# Altium PCB SFCslaver.PcbDoc (part 3 of 6)
Units mm, origin at the board's own origin, x right, y up, seen from the top; angles counter-clockwise.
Board outline 149.66 x 75.74 mm, 2 copper layers (Top Layer, Bottom Layer); 284 components, 212 nets, 830 pads, 310 vias.
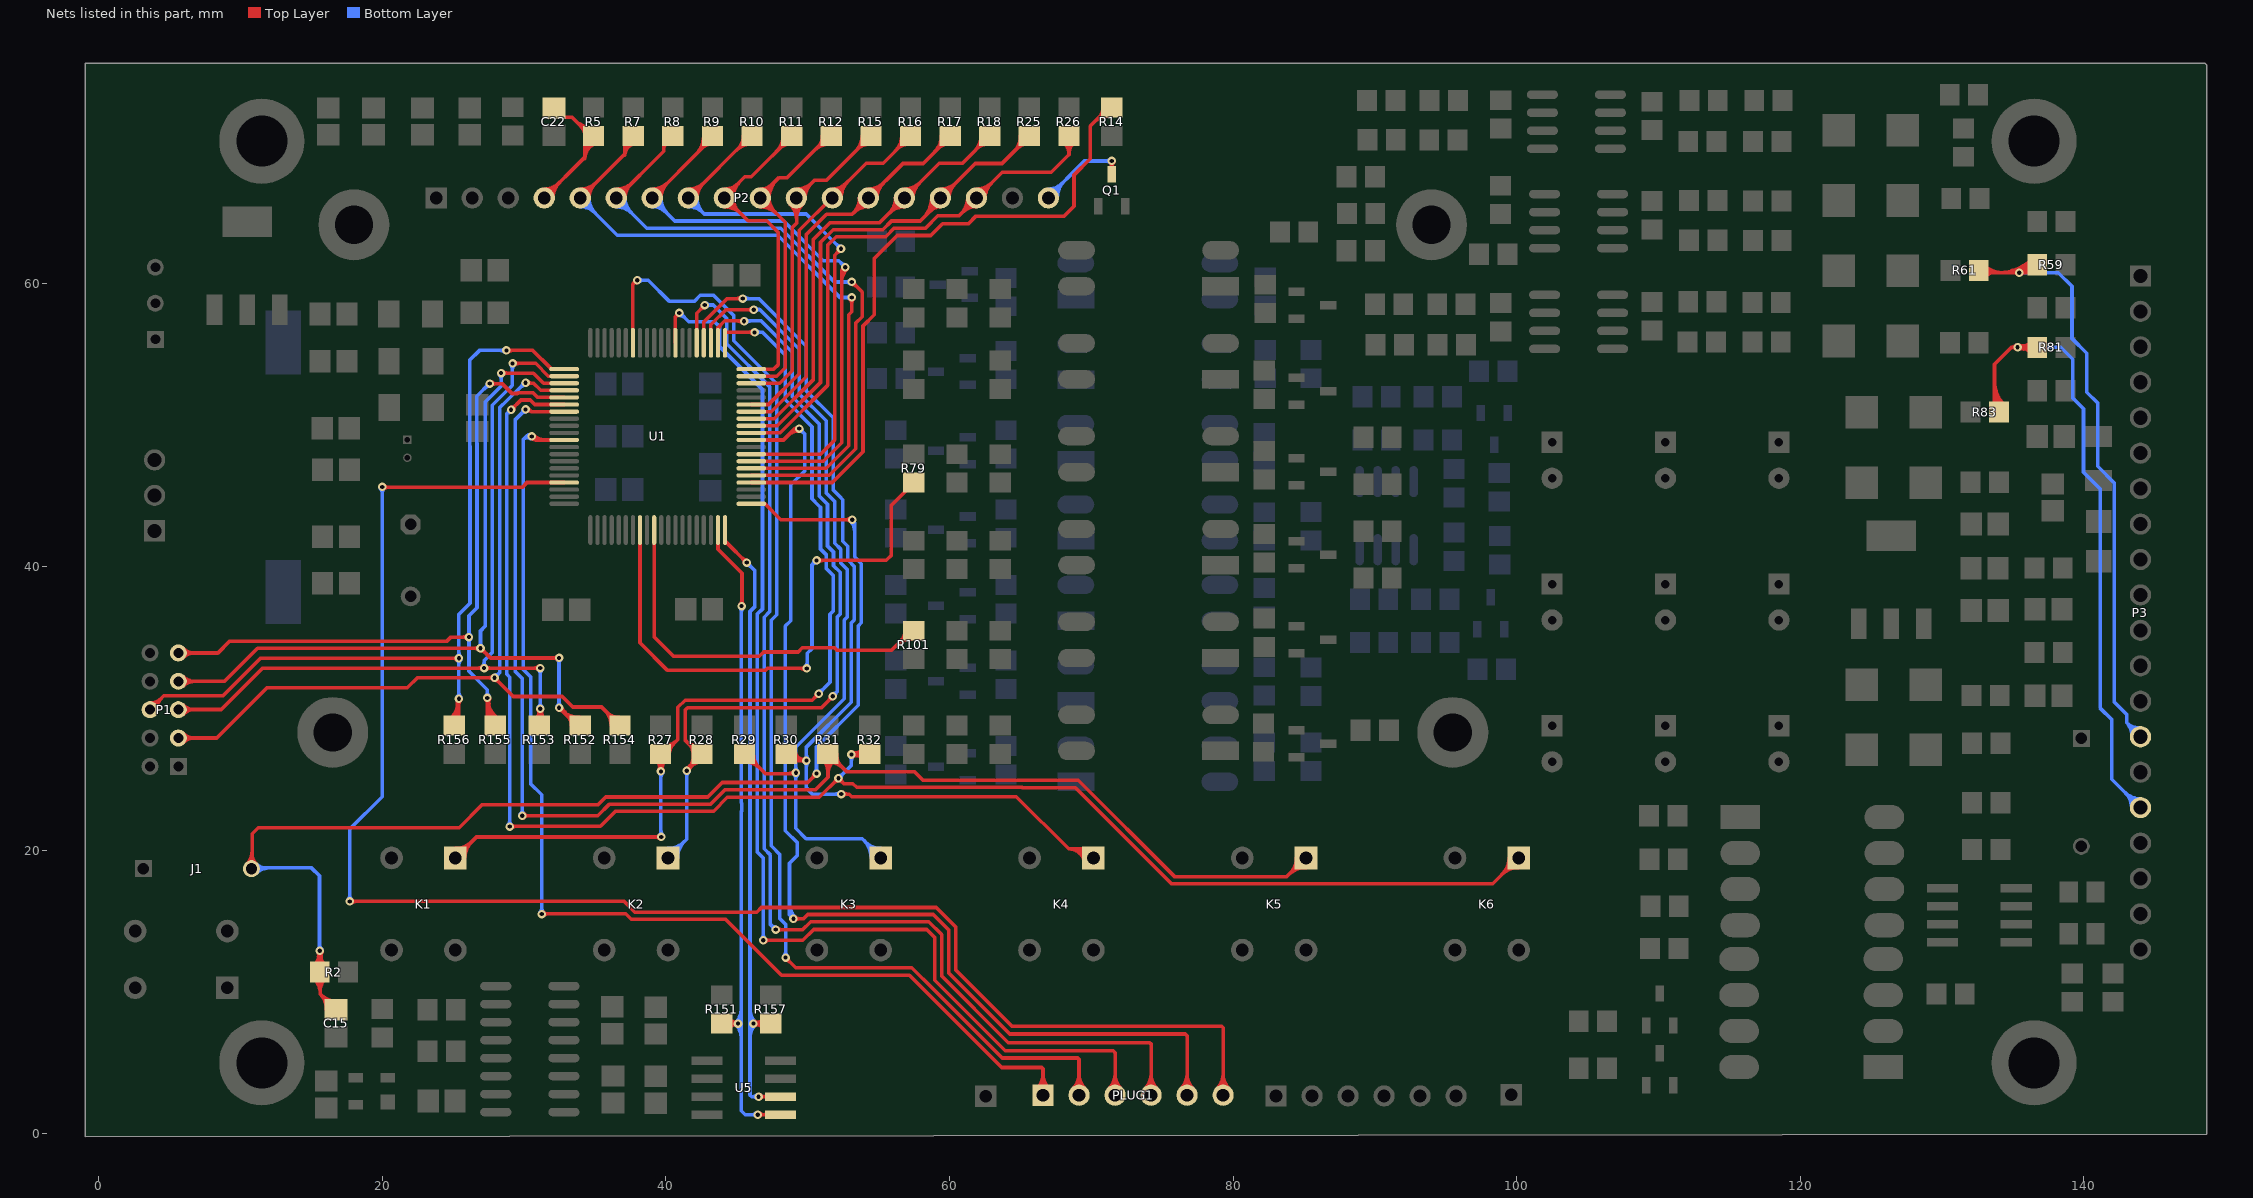
[diagram p3: the nets of this part, all layers, seen from the top]

## Via types
v1: diameter 0.6, hole 0.3, Top Layer to Bottom Layer, 310 vias

## Nets (pads, with @x,y where several pads share a name; then routed paths per layer and width w, separated by ;. In a path a pad name is that pad's centre, name@x,y a point inside that pad or via, vN(x,y) a via of type N, cw(c..) or ccw(c..) an arc to the next point about the centre after c; other vN are vias at no path point) (continued)
I2C_SCL: R157.2 U1.40 U5.6 | length 55.1
  Top Layer w0.254: U1.40@44.173,41.656 cw(c44.173,41.292) 44.43,41.549 ; U1.40@44.173,42.579 44.173,41.806 v1@45.809,40.17 ; v1@45.522,40.284 ccw(c45.104,40.284) 45.399,40.58 ccw(c45.695,40.875) v1@45.695,40.457 ; v1@46.264,7.623 cw(c46.473,7.261) 46.581,7.664 cw(c46.689,8.068) v1@46.327,7.859 ; v1@46.264,7.922 ccw(c46.473,8.284) 46.581,7.88 ccw(c46.689,7.477) v1@46.327,7.686 ; v1@46.3,7.65 cw(c46.595,7.355) 46.595,7.772 cw(c46.595,8.19) v1@46.3,7.895 ; v1(46.533,2.616) 47.93,2.616 U5.6@47.955,2.591 ; v1@46.655,2.494 cw(c46.95,2.199) 46.95,2.616 cw(c46.95,3.034) v1@46.655,2.739 ; R157.2@46.889,7.418 ccw(c46.177,6.881) v1(46.177,7.772) ; R157.2@46.898,8.12 cw(c46.177,8.694) v1(46.177,7.772) ; U5.6@47.169,2.494 ccw(c46.874,2.199) 46.874,2.616 ccw(c46.874,3.034) U5.6@47.169,2.739 ; R157.2@47.6,7.772 v1(46.177,7.772)
  Bottom Layer w0.254: v1@45.695,40.111 cw(c45.695,39.694) 45.99,39.989 cw(c46.285,40.284) v1@45.868,40.284 ; v1@45.72,40.259 46.279,39.7 46.279,37.183 45.931,36.836 v1@45.931,7.755 ; 45.931,6.761 cw(c47.189,6.761) v1@46.3,7.65 ; 45.931,7.374 cw(c46.576,7.374) v1@46.12,7.83 ; 45.931,8.171 ccw(c46.576,8.171) v1@46.12,7.715 ; 45.931,8.784 ccw(c47.189,8.784) v1@46.3,7.895 ; v1@45.999,7.798 v1@46.152,7.798 ; v1(46.177,7.772) 45.949,7.772 v1@45.931,7.755 ; v1@46.41,2.494 ccw(c46.115,2.199) 46.115,2.616 ccw(c46.115,3.034) v1@46.41,2.739 ; v1(46.533,2.616) 46.05,2.616 45.931,2.735 v1@45.931,7.755
  other v1: 45.695,40.284
I2C_SDA: R151.1 U1.39 U5.5 | length 56.3
  Top Layer w0.254: U1.39@43.673,42.579 43.673,41.229 45.364,39.537 45.364,37.16 45.339,37.135 v1(45.339,37.211) ; R151.1@43.942,7.849 43.993,7.798 v1@45.212,7.798 ; R151.1@44.247,7.571 cw(c44.702,7.227) 44.702,7.798 ; R151.1@44.415,8.149 ccw(c45.212,8.877) v1@45.212,7.798 ; R151.1@44.449,7.418 cw(c45.212,6.843) v1@45.212,7.798 ; R151.1@44.577,7.968 cw(c44.427,7.409) v1@44.934,7.689 ; R151.1@44.606,7.798 cw(c44.606,7.293) v1@44.963,7.65 ; 44.729,7.798 ccw(c44.729,8.129) v1@44.963,7.895 ; v1@44.927,7.843 cw(c44.639,7.97) 44.72,7.666 cw(c44.81,7.331) v1@44.994,7.626 ; v1(45.085,7.772) 45.187,7.772 v1@45.212,7.798 ; v1@45.217,37.333 ccw(c44.86,37.69) 45.364,37.69 ; 45.364,37.567 ccw(c45.695,37.567) v1@45.461,37.333 ; v1(46.482,1.346) U5.5@47.879,1.346 ; v1@46.604,1.224 cw(c46.9,0.929) 46.9,1.346 cw(c46.9,1.764) v1@46.604,1.469 ; U5.5@47.169,1.224 ccw(c46.874,0.929) 46.874,1.346 ccw(c46.874,1.764) U5.5@47.169,1.469
  Bottom Layer w0.254: v1@44.963,7.65 cw(c44.115,6.803) 45.314,6.803 ; v1@44.963,7.895 ccw(c44.115,8.742) 45.314,8.742 ; v1(45.085,7.772) 45.11,7.798 v1@45.288,7.798 ; v1@45.142,7.715 ccw(c44.729,8.129) 45.314,8.129 ; v1@45.142,7.83 cw(c44.729,7.416) 45.314,7.416 ; v1@45.217,37.089 cw(c44.983,36.855) 45.314,36.855 ; 45.314,36.732 cw(c45.818,36.732) v1@45.461,37.089 ; v1(45.339,37.211) 45.314,37.186 45.314,23.353 45.351,23.316 45.351,22.759 45.314,22.722 45.314,1.626 45.593,1.346 v1(46.482,1.346) ; v1@46.36,1.224 ccw(c46.064,0.929) 46.064,1.346 ccw(c46.064,1.764) v1@46.36,1.469
ISP_SELECT: C15.1 J1.2 R2.2 U1.41 | length 106.7
  Top Layer w0.254: J1.2@10.435,19.029 ccw(c9.505,19.959) 10.82,19.959 ; J1.2@10.615,18.849 ccw(c10.118,19.346) 10.82,19.346 ; J1.2@10.82,18.72 10.82,21.158 11.252,21.59 25.425,21.59 27.051,23.216 35.23,23.216 35.763,23.749 42.951,23.749 43.975,24.772 49.995,24.772 v1@50.635,25.413 ; 10.82,19.714 ccw(c11.789,19.714) J1.2@11.104,19.029 ; R2.2@15.181,10.949 cw(c14.119,9.887) 15.621,9.887 ; R2.2@15.181,11.86 ccw(c14.18,12.861) v1@15.596,12.861 ; R2.2@15.361,11.129 cw(c14.732,10.5) 15.621,10.5 ; R2.2@15.361,11.68 ccw(c14.793,12.247) 15.596,12.247 ; v1@15.446,12.817 cw(c15.052,12.589) 15.491,12.471 ; v1@15.473,12.781 cw(c15.178,12.486) 15.596,12.486 cw(c16.013,12.486) v1@15.718,12.781 ; 15.505,12.523 cw(c15.872,12.424) v1@15.682,12.753 ; v1@15.509,12.753 cw(c15.339,12.459) 15.667,12.547 ; 15.596,12.202 ccw(c16.334,12.202) R2.2@15.812,11.68 ; v1@15.596,12.815 ccw(c16.947,12.815) R2.2@15.991,11.86 ; v1(15.596,12.903) 15.596,11.303 15.545,11.354 15.697,11.354 15.621,11.43 15.621,9.855 ; 15.621,10.055 cw(c16.886,10.055) R2.2@15.991,10.949 ; 15.693,9.783 ccw(c16.689,10.779) C15.1@16.689,9.371 ; 15.696,12.441 cw(c16.174,12.569) v1@15.745,12.817 ; C15.1@16.045,9.431 cw(c15.383,8.768) C15.1@16.32,8.754 ; C15.1@16.066,8.758 ccw(c14.547,8.781) 15.621,9.855 ; C15.1@16.127,9.35 ccw(c16.689,9.912) C15.1@16.689,9.117 ; C15.1@16.764,8.712 15.621,9.855 ; U1.41@46.023,44.429 46.986,44.429 48.108,43.307 v1@53.086,43.307 ; U1.41@46.923,44.406 cw(c46.923,44.197) 47.07,44.345 ; v1@50.449,25.4 cw(c50.032,25.4) 50.327,25.105 cw(c50.622,24.809) v1@50.622,25.227 ; v1@53.014,43.185 ccw(c52.719,42.889) 52.719,43.307 ccw(c52.719,43.725) v1@53.014,43.429
  Bottom Layer w0.254: J1.2@10.795,18.745 15.011,18.745 15.57,18.186 v1@15.57,12.903 ; J1.2@10.924,18.54 cw(c11.421,18.043) 11.421,18.745 ; J1.2@11.104,18.36 cw(c12.034,17.43) 12.034,18.745 ; J1.2@11.104,19.029 ccw(c11.789,19.714) 11.789,18.745 ; v1@15.473,13.026 ccw(c15.239,13.26) 15.57,13.26 ; 15.57,13.382 ccw(c16.075,13.382) v1@15.718,13.026 ; v1@50.5,25.522 ccw(c50.205,25.818) 50.622,25.818 ccw(c51.04,25.818) v1@50.745,25.522 ; v1(50.622,25.4) 50.622,27.28 53.569,30.226 53.569,35.813 53.787,36.031 53.787,40.21 53.316,40.68 53.316,43.077 v1@53.086,43.307 ; v1@53.014,43.185 cw(c52.286,42.456) 53.316,42.456
  other v1: 53.137,43.307
JL3: PLUG1.6 U1.17 | length 121.7
  Top Layer w0.254: v1(17.704,16.383) 37.059,16.383 37.812,15.63 46.409,15.63 46.738,15.959 59.07,15.959 60.455,14.573 60.455,11.536 64.413,7.578 79.188,7.578 79.299,7.468 PLUG1.6@79.299,2.718 ; v1@17.826,16.261 cw(c18.121,15.965) 18.121,16.383 cw(c18.121,16.801) v1@17.826,16.505 ; v1@19.99,45.644 20.052,45.581 29.859,45.581 30.206,45.929 U1.17@32.823,45.929 ; v1@20.112,45.496 cw(c20.318,45.29) 20.318,45.581 ; v1@20.112,45.741 ccw(c20.497,46.125) 20.497,45.581 ; PLUG1.6@78.858,3.158 ccw(c77.795,4.222) 79.299,4.222 ccw(c80.803,4.222) PLUG1.6@79.739,3.158 ; PLUG1.6@79.038,2.979 ccw(c78.408,3.609) 79.299,3.609 ccw(c80.19,3.609) PLUG1.6@79.56,2.979
  Bottom Layer w0.254: v1@17.581,16.505 ccw(c17.286,16.801) 17.704,16.801 ccw(c18.121,16.801) v1@17.826,16.505 ; v1(17.704,16.383) 17.704,21.488 19.99,23.774 v1@19.99,45.644 ; v1@19.867,45.496 cw(c19.572,45.201) 19.99,45.201 cw(c20.407,45.201) v1@20.112,45.496
  other v1: 19.99,45.618
JL6: PLUG1.5 U1.50 | length 85.3
  Top Layer w0.254: U1.50@46.023,48.929 48.294,48.929 49.098,49.733 ; 48.587,49.222 cw(c49.403,48.407) v1@49.403,49.56 ; 49.021,49.656 cw(c49.403,49.274) v1@49.403,49.814 ; v1@49.073,15.164 49.708,15.164 50.004,15.46 58.863,15.46 59.956,14.366 59.956,11.329 64.25,7.036 76.632,7.036 76.759,6.909 PLUG1.5@76.759,2.718 ; v1@49.119,15.041 cw(c49.414,14.746) 49.414,15.164 cw(c49.414,15.581) v1@49.119,15.286 ; v1@49.254,49.645 ccw(c49.098,49.551) 49.098,49.733 ; v1@49.254,49.822 cw(c49.098,49.915) 49.098,49.733 ; v1(49.403,49.733) 49.098,49.733 ; PLUG1.5@76.318,3.158 ccw(c75.255,4.222) 76.759,4.222 ccw(c78.263,4.222) PLUG1.5@77.199,3.158 ; PLUG1.5@76.498,2.979 ccw(c75.868,3.609) 76.759,3.609 ccw(c77.65,3.609) PLUG1.5@77.02,2.979
  Bottom Layer w0.254: 48.717,15.643 ccw(c49.476,15.643) v1@48.939,15.107 ; 48.717,16.256 ccw(c50.089,16.256) v1@49.119,15.286 ; v1@48.857,15.329 48.831,15.329 48.717,15.443 48.717,19.075 49.276,19.634 49.276,20.523 48.426,21.373 48.426,35.802 48.81,36.186 48.81,45.762 49.805,46.757 49.805,49.331 49.416,49.721 v1@49.416,49.746 ; v1@49.403,49.56 cw(c49.403,49.143) 49.698,49.438 cw(c49.994,49.733) v1@49.576,49.733
  other v1: 48.997,15.164
JL7: PLUG1.4 U1.65 | length 91.8
  Top Layer w0.254: U1.65@42.173,55.779 42.173,57.87 v1@42.723,58.42 ; v1@42.575,58.445 cw(c42.158,58.445) 42.453,58.15 cw(c42.748,57.855) v1@42.748,58.272 ; v1(47.752,14.402) 47.777,14.427 47.777,14.529 47.93,14.376 49.632,14.376 50.216,14.961 58.541,14.961 59.457,14.045 59.457,11.123 64.154,6.426 74.117,6.426 74.219,6.325 PLUG1.4@74.219,2.718 ; v1@47.874,14.279 cw(c48.108,14.045) 48.108,14.376 ; v1@47.874,14.524 ccw(c48.231,14.881) 48.231,14.376 ; PLUG1.4@73.778,3.158 ccw(c72.715,4.222) 74.219,4.222 ccw(c75.723,4.222) PLUG1.4@74.659,3.158 ; PLUG1.4@73.958,2.979 ccw(c73.328,3.609) 74.219,3.609 ccw(c75.11,3.609) PLUG1.4@74.48,2.979
  Bottom Layer w0.254: v1@42.723,58.445 43.338,58.445 44.281,57.502 44.281,55.724 47.311,52.694 47.311,36.804 46.929,36.422 46.929,20.096 47.371,19.654 47.371,14.757 47.591,14.538 v1@47.743,14.538 ; v1@42.871,58.323 cw(c43.166,58.028) 43.166,58.445 cw(c43.166,58.863) v1@42.871,58.568 ; 47.413,14.715 ccw(c47.752,15.054) v1@47.752,14.575 ; 47.475,14.654 cw(c47.223,14.402) v1@47.579,14.402
  other v1: 42.748,58.445
JL8: PLUG1.3 U1.68 | length 90
  Top Layer w0.254: U1.68@40.673,55.779 40.673,57.614 ; v1@40.772,57.876 cw(c40.431,57.856) 40.673,57.614 ; v1@40.894,57.887 40.894,57.836 40.673,57.614 ; v1@40.935,57.714 ccw(c40.914,57.373) 40.673,57.614 ; v1(46.863,13.64) 49.657,13.64 50.419,14.402 58.395,14.402 58.958,13.838 58.958,10.815 63.931,5.842 71.552,5.842 71.679,5.715 PLUG1.3@71.679,2.718 ; v1@46.985,13.517 cw(c47.281,13.222) 47.281,13.64 cw(c47.281,14.057) v1@46.985,13.762 ; PLUG1.3@71.238,3.158 ccw(c70.175,4.222) 71.679,4.222 ccw(c73.183,4.222) PLUG1.3@72.119,3.158 ; PLUG1.3@71.418,2.979 ccw(c70.788,3.609) 71.679,3.609 ccw(c72.57,3.609) PLUG1.3@71.94,2.979
  Bottom Layer w0.254: v1@40.945,57.714 cw(c40.945,57.173) 41.327,57.555 ; v1@40.996,57.887 41.605,57.277 43.434,57.277 43.782,56.929 43.782,55.517 46.812,52.487 46.812,37.011 46.43,36.629 46.43,19.889 46.872,19.447 v1@46.872,13.665 ; v1@41.118,57.887 ccw(c41.413,57.887) 41.204,57.678 ; v1@46.741,13.762 ccw(c46.424,14.079) 46.872,14.079 ; 46.872,14.036 ccw(c47.259,14.036) v1@46.985,13.762
  other v1: 40.945,57.887
JL9: PLUG1.2 U1.74 | length 92.4
  Top Layer w0.254: U1.74@37.673,55.779 37.673,59.923 ; 37.696,59.946 ccw(c37.444,60.198) v1@37.8,60.198 ; v1@37.957,60.026 ccw(c37.924,59.671) 37.673,59.923 ; v1(37.973,60.198) 37.973,60.223 37.673,59.923 ; v1@48.438,12.248 cw(c48.438,11.83) 48.733,12.125 cw(c49.028,12.421) v1@48.611,12.421 ; v1(48.438,12.421) 49.149,11.709 57.348,11.709 58.156,10.901 58.166,10.901 63.724,5.343 69.028,5.343 69.139,5.232 PLUG1.2@69.139,2.718 ; PLUG1.2@68.698,3.158 ccw(c67.635,4.222) 69.139,4.222 ccw(c70.643,4.222) PLUG1.2@69.579,3.158 ; PLUG1.2@68.878,2.979 ccw(c68.248,3.609) 69.139,3.609 ccw(c70.03,3.609) PLUG1.2@69.4,2.979
  Bottom Layer w0.254: v1(37.973,60.198) 38.76,60.198 40.259,58.699 42.001,58.699 42.433,59.131 43.358,59.131 44.78,57.709 44.78,55.931 47.81,52.901 47.81,36.598 47.428,36.216 47.428,20.303 48.031,19.699 48.031,15.179 48.449,14.761 48.449,12.432 v1(48.438,12.421) ; v1@38.095,60.076 cw(c38.391,59.78) 38.391,60.198 cw(c38.391,60.616) v1@38.095,60.32 ; v1@48.315,12.543 ccw(c47.992,12.866) 48.449,12.866 ; 48.449,12.81 ccw(c48.827,12.81) v1@48.56,12.543
JL10: PLUG1.1 U1.11 | length 87.4
  Top Layer w0.254: v1@30.474,49.117 ccw(c30.929,49.572) 30.929,48.929 ; v1@30.556,49.2 30.827,48.929 ; v1@30.567,49.005 cw(c30.627,48.728) 30.827,48.929 ; v1@30.653,49.297 ccw(c31.542,50.185) 31.542,48.929 ; v1@30.704,49.174 ccw(c30.999,49.174) 30.79,48.966 ; v1(31.242,15.494) 31.267,15.519 37.16,15.519 37.549,15.131 44.203,15.131 48.158,11.176 57.175,11.176 63.678,4.674 66.497,4.674 66.599,4.572 PLUG1.1@66.599,2.718 ; v1@31.364,15.372 cw(c31.721,15.015) 31.721,15.519 ; v1@31.364,15.616 ccw(c31.598,15.85) 31.598,15.519 ; U1.11@32.823,48.929 30.827,48.929 ; PLUG1.1@66.158,3.158 ccw(c65.095,4.222) 66.599,4.222 ccw(c68.103,4.222) PLUG1.1@67.039,3.158 ; PLUG1.1@66.338,2.979 ccw(c65.708,3.609) 66.599,3.609 ccw(c67.49,3.609) PLUG1.1@66.86,2.979
  Bottom Layer w0.254: 30.173,49.197 cw(c30.402,48.968) v1@30.574,49.243 ; v1@30.401,49.061 ccw(c30.15,48.841) 30.15,49.174 ; v1@30.401,49.288 cw(c30.15,49.507) 30.15,49.174 ; v1@30.439,49.028 ccw(c30.228,48.689) 29.947,48.971 ; v1(30.531,49.174) 30.15,49.174 ; v1@31.12,15.616 ccw(c30.824,15.912) 31.242,15.912 ccw(c31.66,15.912) v1@31.364,15.616 ; v1(31.242,15.494) 31.242,23.901 30.455,24.689 30.455,32.233 29.947,32.741 29.947,48.971 ; 29.947,48.971 30.15,49.174
JTAG_TCK: P1.9 R155.1 U1.5 | length 64.7
  Top Layer w0.254: P1.9@5.613,33.908 8.406,33.908 9.246,34.747 24.562,34.747 24.841,35.027 v1(26.111,35.027) ; P1.9@5.948,33.574 cw(c6.755,32.766) 6.755,33.908 cw(c6.755,35.05) P1.9@5.948,34.242 ; v1@25.989,34.904 ccw(c25.694,34.609) 25.694,35.027 ccw(c25.694,35.444) v1@25.989,35.149 ; v1@27.284,30.612 cw(c26.989,30.316) 27.407,30.316 cw(c27.824,30.316) v1@27.529,30.612 ; v1@27.32,30.584 cw(c27.1,30.203) 27.525,30.317 ; v1@27.33,30.836 v1@27.407,30.759 ; R155.1@27.407,29.37 ccw(c28.287,29.37) R155.1@27.814,28.628 ; 27.407,29.833 ccw(c28.582,29.833) R155.1@27.95,28.842 ; 27.407,30.296 ccw(c28.876,30.296) R155.1@28.087,29.057 ; 27.517,30.348 cw(c27.899,30.45) v1@27.556,30.648 ; v1@27.584,52.934 27.635,52.883 28.473,52.883 29.152,52.204 29.528,52.204 29.588,52.264 30.627,52.264 30.963,51.929 U1.5@32.823,51.929 ; v1@27.707,52.786 cw(c27.941,52.552) 27.941,52.883 ; v1@27.707,53.031 ccw(c28.063,53.387) 28.063,52.883 ; R155.1@27.965,28.788 27.965,28.804 27.407,29.362 v1@27.407,30.759 ; R155.1@28.223,29.271 cw(c29.171,30.759) v1@27.407,30.759
  Bottom Layer w0.254: v1@25.989,34.904 cw(c25.694,34.609) 26.111,34.609 cw(c26.529,34.609) v1@26.234,34.904 ; v1@25.989,35.149 ccw(c25.694,35.444) 26.111,35.444 ccw(c26.529,35.444) v1@26.234,35.149 ; 27.246,52.595 cw(c27.584,52.256) v1@27.584,52.735 ; v1@27.284,30.856 ccw(c26.989,31.152) 27.407,31.152 ccw(c27.824,31.152) v1@27.529,30.856 ; 27.307,52.656 ccw(c27.055,52.908) v1@27.411,52.908 ; v1@27.407,30.709 27.407,31.318 26.111,32.614 26.111,36.525 26.68,37.094 26.68,48.701 26.67,48.711 26.67,52.019 v1@27.597,52.946
  other v1: 27.407,30.734 27.584,52.908
JTAG_TDI: P1.5 R153.1 U1.2 | length 67.9
  Top Layer w0.254: P1.5@5.639,29.921 8.636,29.921 11.557,32.842 v1(31.14,32.842) ; P1.5@5.948,29.574 cw(c6.787,28.734) 6.787,29.921 ; P1.5@5.948,30.242 ccw(c6.723,31.018) 6.723,29.921 ; v1@27.056,32.72 ccw(c26.76,32.425) 26.76,32.842 ccw(c26.76,33.26) v1@27.056,32.965 ; v1@27.3,32.72 cw(c27.596,32.425) 27.596,32.842 cw(c27.596,33.26) v1@27.3,32.965 ; v1(29.185,54.331) 30.81,54.331 31.712,53.429 U1.2@32.823,53.429 ; v1@29.307,54.208 cw(c29.602,53.913) 29.602,54.331 cw(c29.602,54.748) v1@29.307,54.453 ; R153.1@30.767,29.243 ccw(c30.193,29.997) v1@31.14,29.997 ; v1@30.991,29.886 cw(c30.648,29.688) 31.03,29.586 ; v1@31.018,29.85 cw(c30.723,29.554) 31.14,29.554 cw(c31.558,29.554) v1@31.263,29.85 ; v1@31.018,32.72 ccw(c30.723,32.425) 30.723,32.842 ccw(c30.723,33.26) v1@31.018,32.965 ; 31.022,29.555 cw(c31.447,29.441) v1@31.227,29.822 ; v1@31.054,29.822 cw(c30.834,29.441) 31.259,29.555 ; R153.1@31.14,28.762 v1@31.14,29.997 ; 31.251,29.586 cw(c31.633,29.688) v1@31.29,29.886 ; R153.1@31.493,29.218 cw(c32.179,29.997) v1@31.14,29.997
  Bottom Layer w0.254: v1@27.056,32.965 ccw(c26.76,33.26) 27.178,33.26 ccw(c27.596,33.26) v1@27.3,32.965 ; v1(27.178,32.842) 27.178,33.376 27.746,33.943 27.746,51.373 28.598,52.225 28.609,52.225 29.159,52.776 29.159,54.254 v1@29.21,54.305 ; v1@29.062,54.208 cw(c28.828,53.974) 29.159,53.974 ; 29.159,53.852 cw(c29.664,53.852) v1@29.307,54.208 ; v1@31.018,30.094 ccw(c30.723,30.39) 31.14,30.39 ccw(c31.558,30.39) v1@31.263,30.094 ; v1@31.018,32.72 cw(c30.723,32.425) 31.14,32.425 cw(c31.558,32.425) v1@31.263,32.72 ; v1(31.14,29.972) v1@31.14,32.868
JTAG_TDO: P1.6 R156.1 U1.1 | length 68.1
  Top Layer w0.254: P1.6@3.613,29.908 4.592,30.886 8.763,30.886 11.405,33.528 25.375,33.528 25.4,33.503 v1(25.4,33.528) ; P1.6@3.613,30.381 ccw(c3.613,31.523) 4.421,30.715 ccw(c5.228,29.908) P1.6@4.086,29.908 ; R156.1@24.735,29.212 ccw(c23.405,30.683) 25.388,30.683 R156.1@25.388,28.843 ; R156.1@24.906,29.024 ccw(c23.923,30.111) 25.388,30.111 ; R156.1@25.076,28.836 ccw(c24.44,29.538) 25.388,29.538 ; v1@25.25,30.597 cw(c24.923,30.408) 25.288,30.31 ; 25.273,30.256 cw(c25.715,30.137) v1@25.486,30.533 ; v1@25.278,30.561 cw(c25.011,30.295) 25.388,30.295 ; v1@25.278,33.406 ccw(c24.982,33.11) 24.982,33.528 ccw(c24.982,33.946) v1@25.278,33.65 ; 25.388,29.524 ccw(c25.856,29.524) R156.1@25.525,29.193 ; 25.388,30.236 cw(c25.847,30.236) v1@25.522,30.561 ; v1(28.753,55.245) 28.753,55.27 28.778,55.245 30.62,55.245 31.826,54.038 31.826,54.02 31.918,53.929 U1.1@32.823,53.929 ; v1@28.875,55.123 cw(c29.17,54.827) 29.17,55.245 cw(c29.17,55.663) v1@28.875,55.367
  Bottom Layer w0.254: v1@25.278,30.806 ccw(c24.982,31.101) 25.4,31.101 ccw(c25.818,31.101) v1@25.522,30.806 ; v1@25.278,33.406 cw(c24.982,33.11) 25.4,33.11 cw(c25.818,33.11) v1@25.522,33.406 ; v1@25.278,33.65 ccw(c24.982,33.946) 25.4,33.946 ccw(c25.818,33.946) v1@25.522,33.65 ; v1@25.4,30.658 25.4,36.627 26.181,37.408 26.181,48.495 26.171,48.505 26.171,54.568 26.848,55.245 28.778,55.245 28.753,55.27 v1(28.753,55.245) ; v1@28.63,55.123 ccw(c28.335,54.827) 28.335,55.245 ccw(c28.335,55.663) v1@28.63,55.367
  other v1: 25.4,30.683
JTAG_TMS: P1.7 R152.1 U1.3 | length 69.8
  Top Layer w0.254: P1.7@5.613,31.908 8.87,31.908 11.201,34.239 26.949,34.239 27.635,33.553 v1(32.461,33.553) ; P1.7@5.948,31.574 cw(c6.755,30.766) 6.755,31.908 cw(c6.755,33.05) P1.7@5.948,32.242 ; v1@26.802,34.117 ccw(c26.506,33.822) 26.506,34.239 ccw(c26.506,34.657) v1@26.802,34.362 ; v1@26.924,34.066 cw(c26.924,33.587) 27.263,33.926 ; v1@27.097,34.239 ccw(c27.453,34.239) 27.201,33.987 ; v1(28.372,53.645) 30.658,53.645 31.374,52.929 U1.3@32.823,52.929 ; v1@28.494,53.522 cw(c28.789,53.227) 28.789,53.645 cw(c28.789,54.062) v1@28.494,53.767 ; v1@32.339,33.431 ccw(c32.044,33.136) 32.044,33.553 ccw(c32.044,33.971) v1@32.339,33.676 ; v1@32.461,29.875 cw(c32.461,29.458) 32.757,29.753 cw(c33.052,30.048) v1@32.634,30.048 ; v1(32.461,30.048) 33.239,29.27 33.477,29.27 R152.1@33.96,28.788 ; v1@32.611,29.899 ccw(c33.91,31.198) R152.1@33.91,29.361 ; v1@32.628,30.093 ccw(c33.212,30.249) 32.91,29.726 ; 33.044,29.465 ccw(c33.91,30.331) R152.1@33.91,29.107 ; 33.065,29.445 cw(c32.407,28.788) R152.1@33.337,28.788
  Bottom Layer w0.254: v1@26.802,34.362 ccw(c26.506,34.657) 26.924,34.657 ccw(c27.342,34.657) v1@27.046,34.362 ; v1@26.924,34.138 26.924,35.458 27.247,35.781 27.247,51.58 28.397,52.73 v1@28.397,53.67 ; v1@28.249,53.522 cw(c27.893,53.166) 28.397,53.166 ; 28.397,53.288 cw(c28.728,53.288) v1@28.494,53.522 ; v1@32.339,30.171 ccw(c32.044,30.466) 32.461,30.466 ccw(c32.879,30.466) v1@32.584,30.171 ; v1@32.339,33.431 cw(c32.044,33.136) 32.461,33.136 cw(c32.879,33.136) v1@32.584,33.431 ; v1@32.461,30.074 v1@32.461,33.579
  other v1: 26.924,34.239
JTAG_TRST: P1.3 R154.1 U1.4 | length 66.9
  Top Layer w0.254: P1.3@5.613,27.908 8.325,27.908 11.862,31.445 21.768,31.445 22.479,32.156 v1(27.915,32.156) 29.235,30.836 32.69,30.836 33.426,30.099 35.455,30.099 R154.1@36.763,28.792 ; P1.3@5.948,27.574 cw(c6.755,26.766) 6.755,27.908 cw(c6.755,29.05) P1.3@5.948,28.242 ; v1@27.792,32.034 ccw(c27.497,31.739) 27.497,32.156 ccw(c27.497,32.574) v1@27.792,32.279 ; v1@27.915,31.983 cw(c27.915,31.566) 28.21,31.861 cw(c28.505,32.156) v1@28.088,32.156 ; v1@30.175,52.934 30.663,52.934 31.168,52.429 U1.4@32.823,52.429 ; v1@30.221,52.837 cw(c30.455,52.603) 30.455,52.934 ; v1@30.221,53.081 ccw(c30.578,53.438) 30.578,52.934 ; 35.699,29.855 cw(c34.635,28.792) R154.1@36.14,28.792 ; 35.82,29.735 ccw(c36.713,30.627) R154.1@36.713,29.365 ; R154.1@36.133,29.422 cw(c35.503,28.792) R154.1@36.394,28.792
  Bottom Layer w0.254: v1@27.915,32.329 ccw(c27.915,32.747) 28.21,32.452 ccw(c28.505,32.156) v1@28.088,32.156 ; v1@27.927,32.169 28.27,32.512 28.27,51.192 28.805,51.726 28.815,51.726 30.035,52.946 v1@30.137,52.946 ; 29.717,52.628 cw(c30.099,52.246) v1@30.099,52.786 ; 29.84,52.75 ccw(c29.631,52.959) v1@29.926,52.959
  other v1: 30.099,52.959
KEY_DOWN: K4.1 R30.1 U1.64 | length 82.4
  Top Layer w0.254: U1.64@42.673,55.779 42.673,57.124 ; 42.672,57.125 42.672,57.252 44.323,58.903 v1@45.517,58.903 ; v1@45.293,58.78 ccw(c44.998,58.485) 44.998,58.903 ccw(c44.998,59.32) v1@45.293,59.025 ; R30.1@48.489,26.772 48.489,26.746 48.92,26.314 49.936,26.314 cw(c49.936,27.197) R30.1@49.089,26.951 ; R30.1@48.601,26.81 ccw(c49.26,27.001) 49.26,26.314 ; R30.1@48.845,26.881 ccw(c49.598,27.099) 49.598,26.314 ; 49.494,26.433 cw(c49.38,26.008) v1@49.761,26.228 ; 49.525,26.425 ccw(c49.627,26.807) v1@49.825,26.464 ; v1@49.789,26.192 ccw(c49.493,25.897) 49.493,26.314 ccw(c49.493,26.732) v1@49.789,26.437 ; v1(52.375,23.952) 52.934,23.952 53.111,23.774 64.719,23.774 68.402,20.091 ; v1@52.497,23.83 cw(c52.792,23.535) 52.792,23.952 cw(c52.792,24.37) v1@52.497,24.075 ; 68.74,20.091 cw(c68.74,19.043) K4.1@69.747,19.334 ; 69.078,20.091 cw(c69.078,19.14) K4.1@69.991,19.404 ; K4.1@69.415,20.091 cw(c69.415,19.238) K4.1@70.236,19.475 ; K4.1@69.503,19.263 ccw(c68.402,18.945) 68.402,20.091 ; K4.1@70.155,19.456 70.155,19.66 69.723,20.091 68.402,20.091
  Bottom Layer w0.254: v1@45.39,58.953 45.441,58.903 46.54,58.903 49.905,55.538 49.905,52.383 51.801,50.487 51.801,45.399 52.283,44.917 52.283,44.915 52.476,44.721 52.476,43.597 52.465,43.585 52.465,41.795 52.817,41.442 52.817,40.474 53.288,40.003 53.288,36.238 53.07,36.02 53.07,30.438 49.911,27.28 49.911,24.384 50.343,23.952 v1(52.375,23.952) ; v1@45.538,58.78 cw(c45.833,58.485) 45.833,58.903 cw(c45.833,59.32) v1@45.538,59.025 ; v1@49.789,26.192 cw(c49.493,25.897) 49.911,25.897 cw(c50.329,25.897) v1@50.033,26.192 ; v1@49.789,26.437 ccw(c49.493,26.732) 49.911,26.732 ccw(c50.329,26.732) v1@50.033,26.437 ; v1@52.252,23.83 ccw(c51.957,23.535) 51.957,23.952 ccw(c51.957,24.37) v1@52.252,24.075
  other v1: 49.911,26.314 45.415,58.903
KEY_ENTER: K6.1 R32.1 U1.6 | length 127.2
  Top Layer w0.254: v1(28.981,21.666) 29.007,21.692 35.382,21.692 36.442,22.751 43.365,22.751 44.337,23.724 50.825,23.724 v1(52.172,25.07) 52.553,24.689 53.188,24.689 53.451,24.426 65.129,24.426 65.145,24.409 68.885,24.409 75.658,17.637 98.307,17.637 99.873,19.202 K6.1@99.873,19.634 ; v1(29.083,51.054) 29.78,51.751 30.434,51.751 30.757,51.429 U1.6@32.823,51.429 ; v1@29.083,51.227 ccw(c29.083,51.645) 29.378,51.349 ccw(c29.674,51.054) v1@29.256,51.054 ; v1@29.104,21.544 cw(c29.46,21.187) 29.46,21.692 ; v1@29.104,21.789 ccw(c29.338,22.023) 29.338,21.692 ; v1@51.999,25.07 cw(c51.581,25.07) 51.876,24.774 cw(c52.172,24.479) 52.172,24.897 cw(c52.172,24.479) 52.467,24.774 cw(c52.762,25.07) v1@52.345,25.07 ; v1@53.172,26.596 cw(c53.412,26.182) 53.536,26.644 ; v1@53.173,26.896 ccw(c53.328,27.166) 53.409,26.865 ; v1@53.208,26.624 cw(c53.565,26.267) 53.565,26.772 ; v1@53.208,26.869 ccw(c53.442,27.103) 53.442,26.772 ; v1@53.236,26.66 cw(c53.689,26.398) 53.554,26.904 ; v1@53.236,26.833 ccw(c53.544,27.011) 53.452,26.667 ; 53.605,26.772 ccw(c53.605,27.4) R32.1@54.087,26.997 ; R32.1@53.892,27.16 cw(c53.061,27.856) v1@53.061,26.772 ; R32.1@53.912,26.401 ccw(c53.061,25.608) v1@53.061,26.772 ; R32.1@54.204,26.848 R32.1@54.216,26.835 ; R32.1@54.407,26.772 v1@53.061,26.772 ; 98.951,18.28 cw(c100.15,17.081) K6.1@100.15,18.777 ; 99.022,18.352 ccw(c97.924,19.45) K6.1@99.477,19.45 ; K6.1@99.384,18.714 cw(c100.15,17.948) K6.1@100.15,19.031 ; K6.1@99.456,18.785 ccw(c98.791,19.45) K6.1@99.731,19.45
  Bottom Layer w0.254: 28.769,50.766 cw(c29.05,50.485) v1@29.073,50.881 ; 28.806,50.802 ccw(c28.554,51.054) v1@28.91,51.054 ; v1@28.859,21.789 ccw(c28.542,22.106) 28.99,22.106 ; v1@28.943,50.94 28.769,50.766 28.769,32.419 28.99,32.198 v1@28.99,21.692 ; 28.99,22.062 ccw(c29.377,22.062) v1@29.104,21.789 ; v1(52.172,25.07) 53.086,25.984 v1@53.086,26.772 ; v1@52.172,25.243 ccw(c52.172,25.66) 52.467,25.365 ccw(c52.762,25.07) v1@52.345,25.07 ; v1@52.964,26.624 cw(c52.668,26.329) 53.086,26.329 cw(c53.504,26.329) v1@53.208,26.624
  other v1: 53.086,26.746
KEY_ESC: K1.1 R27.1 U1.61 | length 82.9
  Top Layer w0.254: K1.1@24.854,19.418 25.133,19.418 26.645,20.93 v1(39.675,20.93) ; K1.1@25.15,19.869 ccw(c25.15,20.917) K1.1@25.891,20.176 ; K1.1@25.15,20.123 ccw(c25.15,21.784) 26.324,20.609 ; K1.1@25.569,19.45 cw(c26.544,19.45) K1.1@25.855,20.14 ; K1.1@25.823,19.45 cw(c27.412,19.45) 26.288,20.573 ; R27.1@39.289,26.368 cw(c38.547,25.552) v1(39.649,25.552) ; v1@39.5,25.639 ccw(c39.138,25.848) 39.541,25.956 ccw(c39.945,26.064) v1@39.736,25.702 ; v1@39.527,25.675 ccw(c39.232,25.97) 39.649,25.97 ccw(c40.067,25.97) v1@39.772,25.675 ; v1@39.552,20.807 ccw(c39.257,20.512) 39.257,20.93 ccw(c39.257,21.347) v1@39.552,21.052 ; v1@39.563,25.702 ccw(c39.354,26.064) 39.758,25.956 ccw(c40.161,25.848) v1@39.799,25.639 ; 39.649,26.079 cw(c40.241,26.079) R27.1@39.873,26.542 ; R27.1@39.696,27.11 ccw(c39.761,28.079) 40.448,27.392 ; R27.1@39.7,26.848 39.903,26.848 40.843,27.788 ; R27.1@39.7,26.924 39.649,26.873 v1(39.649,25.552) ; R27.1@39.713,27.363 ccw(c39.811,28.819) 40.843,27.788 ; R27.1@40.031,26.344 ccw(c40.661,25.552) v1(39.649,25.552) ; R27.1@40.247,26.792 cw(c41.212,26.792) 40.53,27.474 ; U1.61@44.173,55.779 44.173,56.437 44.276,56.54 46.228,56.54 v1(46.253,56.515) ; 45.774,56.54 cw(c45.774,56.036) v1@46.131,56.393 ; 45.897,56.54 ccw(c45.897,56.871) v1@46.131,56.637 ; v1@50.602,31.039 cw(c50.184,31.039) 50.479,30.743 cw(c50.775,30.448) v1@50.775,30.866 ; v1(50.775,31.039) 50.317,30.582 41.357,30.582 40.843,30.068 40.843,27.788
  Bottom Layer w0.254: v1@39.527,25.43 cw(c39.232,25.135) 39.649,25.135 cw(c40.067,25.135) v1@39.772,25.43 ; v1@39.552,21.052 ccw(c39.318,21.286) 39.649,21.286 ; 39.649,21.409 ccw(c40.154,21.409) v1@39.797,21.052 ; v1(39.649,25.552) 39.649,20.955 v1(39.675,20.93) ; v1(46.253,56.515) 46.228,56.54 46.786,56.54 48.408,54.918 48.408,51.763 50.304,49.867 50.304,44.779 50.786,44.297 50.786,44.294 50.902,44.179 50.902,41.241 51.32,40.822 51.32,39.854 51.791,39.383 51.791,36.858 51.573,36.64 51.573,31.837 v1(50.775,31.039) ; v1@46.376,56.393 cw(c46.732,56.036) 46.732,56.54 ; v1@46.376,56.637 ccw(c46.61,56.871) 46.61,56.54 ; v1@50.775,31.212 ccw(c50.775,31.629) 51.07,31.334 ccw(c51.365,31.039) v1@50.948,31.039
KEY_NEXT: K5.1 R31.1 U1.7 | length 107.5
  Top Layer w0.254: v1(29.87,22.428) 35.204,22.428 36.026,23.25 43.158,23.25 44.181,24.273 50.562,24.273 51.435,25.146 R31.1@51.435,26.873 ; v1@29.993,22.306 cw(c30.288,22.011) 30.288,22.428 cw(c30.288,22.846) v1@29.993,22.551 ; v1(30.099,51.079) 30.353,51.079 30.504,50.929 ; v1@30.207,50.945 cw(c30.347,50.772) 30.504,50.929 ; U1.7@32.823,50.929 30.504,50.929 ; R31.1@51.054,26.387 cw(c50.136,25.468) 51.435,25.468 ; R31.1@51.234,26.566 cw(c50.749,26.081) 51.435,26.081 ; R31.1@51.384,26.797 51.435,26.848 52.739,25.543 57.515,25.543 58.133,24.925 69.081,24.925 75.87,18.136 83.795,18.136 85.141,19.482 K5.1@85.166,19.482 ; 51.435,25.349 cw(c52.902,25.349) R31.1@51.865,26.387 ; 51.435,25.962 cw(c52.289,25.962) R31.1@51.685,26.566 ; R31.1@51.46,26.219 cw(c51.46,24.76) 52.491,25.791 ; R31.1@51.46,26.473 cw(c51.46,25.627) R31.1@52.058,26.225 ; R31.1@51.779,26.792 ccw(c52.473,26.792) R31.1@51.982,26.301 ; R31.1@52.033,26.792 ccw(c53.34,26.792) 52.416,25.867 ; 83.931,18.272 cw(c85.15,17.053) K5.1@85.15,18.777 ; 84.03,18.371 ccw(c82.951,19.45) K5.1@84.477,19.45 ; K5.1@84.365,18.706 cw(c85.15,17.92) K5.1@85.15,19.031 ; K5.1@84.464,18.805 ccw(c83.818,19.45) K5.1@84.731,19.45
  Bottom Layer w0.254: v1@29.748,22.551 ccw(c29.453,22.846) 29.87,22.846 ccw(c30.288,22.846) v1@29.993,22.551 ; v1(29.87,22.428) 29.87,32.111 29.362,32.619 29.362,50.343 v1(30.099,51.079) ; v1@29.926,51.079 cw(c29.508,51.079) 29.804,50.784 cw(c30.099,50.489) v1@30.099,50.906
KEY_PRIOR: K2.1 R28.1 U1.62 | length 71.5
  Top Layer w0.254: v1@41.433,25.77 ccw(c41.325,26.174) 41.687,25.965 ; v1@41.478,25.776 ccw(c41.478,26.194) 41.774,25.899 ccw(c42.069,25.603) v1@41.651,25.603 ; 41.639,27.474 cw(c40.957,26.792) R28.1@41.922,26.792 ; v1@41.645,25.648 cw(c42.049,25.756) 41.687,25.965 ; 41.737,27.376 ccw(c42.389,28.028) R28.1@42.468,27.11 ; 41.81,25.935 cw(c42.495,25.25) R28.1@42.495,26.219 ; 41.882,26.007 ccw(c41.166,26.722) R28.1@42.176,26.775 ; R28.1@41.923,26.762 cw(c40.4,26.682) v1(41.478,25.603) 42.596,26.721 R28.1@42.596,26.873 ; R28.1@42.342,26.772 41.351,27.762 ; R28.1@42.446,27.363 cw(c42.328,28.739) 41.351,27.762 ; R28.1@42.52,26.67 R28.1@42.57,26.721 ; U1.62@43.673,55.779 43.673,56.841 44.16,57.328 45.618,57.328 45.593,57.302 v1(45.517,57.302) ; U1.62@43.696,56.679 cw(c44.143,56.679) 43.827,56.995 ; 45.038,57.328 cw(c45.038,56.823) v1@45.394,57.18 ; 45.16,57.328 ccw(c45.16,57.659) v1@45.394,57.425 ; 51.452,30.522 ccw(c51.113,30.861) v1@51.592,30.861 ; 51.513,30.584 cw(c51.765,30.332) v1@51.765,30.688 ; v1(51.765,30.861) 51.765,30.836 50.978,30.048 41.529,30.048 41.351,29.87 41.351,27.762
  Bottom Layer w0.254: K2.1@39.903,19.406 40.107,19.406 41.478,20.777 v1(41.478,25.603) v1@41.478,25.781 ; K2.1@40.15,19.869 ccw(c40.15,20.883) K2.1@40.867,20.166 ; K2.1@40.15,20.123 ccw(c40.15,21.75) 41.301,20.6 ; K2.1@40.569,19.45 cw(c41.578,19.45) K2.1@40.865,20.164 ; K2.1@40.823,19.45 cw(c42.445,19.45) 41.298,20.597 ; v1@41.356,25.481 cw(c41.061,25.186) 41.478,25.186 cw(c41.896,25.186) v1@41.601,25.481 ; v1@45.593,57.328 46.704,57.328 48.907,55.124 48.907,51.969 50.803,50.073 50.803,44.985 51.285,44.503 51.285,44.501 51.401,44.386 51.401,41.447 51.819,41.029 51.819,40.06 52.29,39.59 52.29,36.651 52.072,36.433 52.072,31.167 v1(51.765,30.861) ; v1@45.639,57.18 cw(c45.996,56.823) 45.996,57.328 ; v1@45.639,57.425 ccw(c45.873,57.659) 45.873,57.328 ; v1@51.765,31.034 ccw(c51.765,31.452) 52.061,31.156 ccw(c52.356,30.861) v1@51.938,30.861
KEY_UP: K3.1 R29.1 U1.63 | length 67.9
  Top Layer w0.254: U1.63@43.173,55.779 43.173,57.047 44.241,58.115 46.177,58.115 v1@46.253,58.191 ; R29.1@45.491,26.822 45.593,26.822 47.015,25.4 v1@49.149,25.4 ; R29.1@45.592,26.219 cw(c45.592,24.76) 46.624,25.791 ; R29.1@45.592,26.473 cw(c45.592,25.627) R29.1@46.19,26.225 ; R29.1@45.911,26.792 ccw(c46.606,26.792) R29.1@46.115,26.301 ; v1@46.08,57.993 ccw(c45.785,57.698) 45.785,58.115 ccw(c45.785,58.533) v1@46.08,58.238 ; R29.1@46.165,26.792 ccw(c47.473,26.792) 46.548,25.867 ; 48.634,25.4 ccw(c48.634,25.991) v1@49.052,25.573 ; K3.1@54.889,19.456 K3.1@54.889,19.736
  Bottom Layer w0.254: v1(46.203,58.115) 46.203,58.141 46.253,58.191 46.304,58.141 46.597,58.141 ; v1@46.325,58.238 ccw(c46.559,58.472) 46.559,58.141 ; v1@46.342,58.012 cw(c46.597,57.823) 46.597,58.141 ; v1@49.052,25.328 cw(c48.818,25.094) 49.149,25.094 ; v1@49.052,25.573 ccw(c48.818,25.807) 49.149,25.807 ; 49.149,24.972 cw(c49.653,24.972) v1@49.297,25.328 ; 49.149,25.93 ccw(c49.653,25.93) v1@49.297,25.573 ; 53.965,20.685 cw(c52.73,19.45) K3.1@54.477,19.45 ; 54.087,20.563 ccw(c55.15,21.626) K3.1@55.15,20.123 ; 54.399,20.252 cw(c53.597,19.45) K3.1@54.731,19.45 ; K3.1@54.521,20.129 ccw(c55.15,20.758) K3.1@55.15,19.869 ; K3.1@55.143,19.456 54.483,20.117 54.483,20.168 53.848,20.803 49.886,20.803 49.149,21.539 49.149,27.254 52.571,30.676 52.571,36.227 52.789,36.445 52.789,39.797 52.318,40.267 52.318,41.236 51.9,41.654 51.9,44.592 51.784,44.708 51.784,44.71 51.302,45.192 51.302,50.28 49.406,52.176 49.406,55.331 46.597,58.141
  other v1: 49.174,25.451
LCD_CS1: P2.5 R7.2 U1.46 | length 58.6
  Top Layer w0.254: P2.5@33.96,66.369 ccw(c33.96,67.347) 34.651,66.655 ; P2.5@33.96,66.623 ccw(c33.96,68.214) 35.085,67.089 ; P2.5@33.985,65.989 37.109,69.113 37.109,69.774 R7.2@37.694,70.358 ; P2.5@34.329,66 cw(c35.133,66) 34.564,66.568 ; P2.5@34.583,66 cw(c36,66) 34.998,67.002 ; 37.109,69.005 cw(c37.942,69.005) R7.2@37.766,69.818 ; 37.109,69.319 cw(c37.874,69.319) R7.2@37.713,70.066 ; 37.109,69.634 cw(c37.806,69.634) R7.2@37.659,70.315 ; R7.2@37.414,70.002 R7.2@37.719,70.307 ; R7.2@37.668,70.485 R7.2@37.821,70.333 ; U1.46@46.023,46.929 47.93,46.929 47.932,46.931 51.314,46.931 52.901,48.518 52.901,57.752 53.111,57.963 v1(53.111,58.979) ; v1@52.989,58.856 cw(c52.694,58.561) 53.111,58.561 cw(c53.529,58.561) v1@53.234,58.856
  Bottom Layer w0.254: P2.5@33.934,66.015 36.576,63.373 38.436,63.373 38.437,63.371 47.892,63.371 52.284,58.979 v1@53.07,58.979 ; P2.5@33.96,65.377 cw(c33.96,63.9) 35.005,64.944 ; P2.5@33.96,65.631 cw(c33.96,64.767) 34.571,65.378 ; P2.5@34.329,66 ccw(c35.246,66) 34.598,65.351 ; P2.5@34.583,66 ccw(c36.114,66) 35.031,64.918 ; v1@52.989,58.856 ccw(c52.694,58.561) 52.694,58.979 ccw(c52.694,59.396) v1@52.989,59.101
LCD_CS2: P2.6 R8.2 U1.45 | length 57.4
  Top Layer w0.254: P2.6@36.5,66.369 ccw(c36.5,67.408) 37.235,66.673 ; P2.6@36.5,66.623 ccw(c36.5,68.275) 37.668,67.107 ; P2.6@36.551,65.989 39.853,69.291 39.853,69.774 R8.2@40.437,70.358 ; P2.6@36.869,66 cw(c37.612,66) 37.087,66.525 ; P2.6@37.123,66 cw(c38.479,66) 37.52,66.959 ; 39.853,69.413 cw(c40.5,69.413) R8.2@40.459,70.06 ; R8.2@39.853,69.684 cw(c40.483,69.684) R8.2@40.443,70.313 ; R8.2@39.98,69.868 R8.2@40.489,70.378 ; R8.2@40.5,70.345 R8.2@40.678,70.345 ; U1.45@46.023,46.429 48.136,46.429 48.139,46.432 51.52,46.432 53.4,48.311 53.4,57.179 53.848,57.627 53.848,59.36 53.073,60.134 53.111,60.173 v1(53.111,60.071) ; v1@53.111,59.898 cw(c53.111,59.419) 53.45,59.758 ; v1@53.284,60.071 ccw(c53.641,60.071) 53.389,59.819
  Bottom Layer w0.254: P2.6@36.5,65.377 cw(c36.5,63.838) 37.588,64.926 ; P2.6@36.5,65.631 cw(c36.5,64.705) 37.155,65.36 ; P2.6@36.5,66 36.505,65.995 36.52,65.995 38.644,63.87 48.098,63.87 51.898,60.071 v1(53.111,60.071) ; P2.6@36.869,66 ccw(c37.725,66) 37.12,65.395 ; P2.6@37.123,66 ccw(c38.592,66) 37.553,64.961 ; v1@52.989,59.949 ccw(c52.694,59.653) 52.694,60.071 ccw(c52.694,60.489) v1@52.989,60.193
LCD_DB0: P2.9 R11.2 U1.60 | length 33.2
  Top Layer w0.254: P2.9@44.094,66.015 45.568,67.488 46.025,67.488 48.871,70.334 R11.2@48.871,70.378 ; P2.9@44.12,65.377 cw(c44.12,63.716) 45.295,64.89 ; P2.9@44.12,65.631 cw(c44.12,64.583) 44.861,65.324 ; P2.9@44.12,66.369 ccw(c44.12,67.163) 44.681,66.601 ; P2.9@44.12,66.623 ccw(c44.12,68.03) 45.115,67.035 ; P2.9@44.183,66.002 45.796,64.389 47.107,64.389 47.911,63.585 47.911,54.222 47.617,53.929 U1.60@46.023,53.929 ; 44.704,65.481 cw(c45.222,66) 44.489,66 cw(c45.477,66) 44.778,66.699 ; 45.137,65.048 cw(c46.09,66) 44.743,66 cw(c46.344,66) 45.212,67.132 ; 47.777,69.24 ccw(c46.639,70.378) R11.2@48.248,70.378 ; 48.003,69.466 cw(c48.821,68.648) R11.2@48.821,69.805 ; 48.211,69.674 ccw(c47.506,70.378) R11.2@48.502,70.378
LCD_DB1: P2.10 R12.2 U1.59 | length 32.3
  Top Layer w0.254: U1.59@46.023,53.429 47.823,53.429 48.41,54.016 48.41,64.29 P2.10@46.672,66.027 ; P2.10@46.558,66.015 47.981,67.437 48.565,67.437 51.506,70.378 R12.2@51.665,70.378 ; P2.10@46.66,65.377 cw(c46.66,63.777) 47.791,64.908 ; P2.10@46.66,65.631 cw(c46.66,64.644) 47.358,65.342 ; P2.10@46.66,66.623 ccw(c46.66,67.846) 47.525,66.981 ; 47.262,65.438 cw(c47.824,66) 47.029,66 cw(c48.201,66) 47.372,66.829 ; 47.695,65.004 cw(c48.691,66) 47.283,66 cw(c49.068,66) 47.806,67.262 ; 50.45,69.323 cw(c51.615,68.158) R12.2@51.615,69.805 ; 50.715,69.587 ccw(c49.923,70.378) R12.2@51.042,70.378 ; 50.884,69.756 cw(c51.615,69.025) R12.2@51.615,70.059
LCD_DB2: P2.11 R15.2 U1.58 | length 33.1
  Top Layer w0.254: U1.58@46.023,52.929 48.029,52.929 48.909,53.809 48.909,63.906 48.911,63.908 48.911,63.921 49.225,64.234 P2.11@49.225,66.015 ; P2.11@48.759,65.559 cw(c47.635,64.435) 49.225,64.435 ; P2.11@48.939,65.739 cw(c48.248,65.048) 49.225,65.048 ; P2.11@49.2,66.369 ccw(c49.2,67.347) 49.891,66.655 ; P2.11@49.2,66.623 ccw(c49.2,68.214) 50.325,67.089 ; 49.225,64.557 cw(c50.643,64.557) P2.11@49.641,65.559 ; 49.225,65.17 cw(c50.03,65.17) P2.11@49.461,65.739 ; P2.11@49.225,65.989 50.495,67.259 51.34,67.259 R15.2@54.459,70.378 ; P2.11@49.569,66 cw(c50.373,66) 49.804,66.568 ; P2.11@49.823,66 cw(c51.24,66) 50.238,67.002 ; 53.396,69.315 ccw(c52.332,70.378) R15.2@53.836,70.378 ; 53.517,69.435 cw(c54.409,68.543) R15.2@54.409,69.805 ; R15.2@53.829,69.748 ccw(c53.2,70.378) R15.2@54.09,70.378 ; R15.2@54.458,70.333 R15.2@54.483,70.358
LCD_DB3: P2.12 R16.2 U1.55 | length 31.7
  Top Layer w0.254: U1.55@46.023,51.429 47.234,51.429 49.408,53.602 49.408,63.699 49.41,63.701 49.41,63.714 P2.12@51.764,66.067 ; P2.12@51.714,66.04 54.127,68.453 55.328,68.453 R16.2@57.253,70.378 ; P2.12@51.74,66.369 ccw(c51.74,67.101) 52.258,66.584 ; P2.12@51.74,66.623 ccw(c51.74,67.969) 52.692,67.017 ; P2.12@52.109,66 cw(c53.158,66) 52.416,66.742 ; P2.12@52.363,66 cw(c54.025,66) 52.85,67.176 ; 56.19,69.315 ccw(c55.126,70.378) R16.2@56.63,70.378 ; 56.311,69.435 cw(c57.203,68.543) R16.2@57.203,69.805 ; R16.2@56.623,69.748 ccw(c55.994,70.378) R16.2@56.884,70.378
LCD_DB4: P2.13 R17.2 U1.54 | length 38.4
  Top Layer w0.254: U1.54@46.023,50.929 47.44,50.929 49.907,53.395 49.907,63.42 51.333,64.846 53.137,64.846 54.28,65.989 56.718,68.428 58.141,68.428 R17.2@60.046,70.333 ; 53.209,64.918 ccw(c52.127,66) P2.13@53.657,66 ; 53.235,64.944 cw(c54.28,63.899) P2.13@54.28,65.377 ; 53.643,65.352 ccw(c52.995,66) P2.13@53.911,66 ; 53.668,65.378 cw(c54.28,64.766) P2.13@54.28,65.631 ; P2.13@54.28,66.369 ccw(c54.28,67.285) 54.928,66.637 ; P2.13@54.28,66.623 ccw(c54.28,68.153) 55.362,67.071 ; P2.13@54.649,66 cw(c55.514,66) 54.902,66.612 ; P2.13@54.903,66 cw(c56.381,66) 55.336,67.045 ; 58.953,69.24 ccw(c57.815,70.378) R17.2@59.424,70.378 ; 59.179,69.466 cw(c59.997,68.648) R17.2@59.997,69.805 ; 59.387,69.674 ccw(c58.682,70.378) R17.2@59.678,70.378
LCD_DB5: P2.14 R18.2 U1.53 | length 41.3
  Top Layer w0.254: U1.53@46.023,50.429 47.646,50.429 50.406,53.189 50.406,63.08 51.587,64.262 55.093,64.262 P2.14@56.845,66.015 ; 55.749,64.918 ccw(c54.667,66) P2.14@56.197,66 ; 55.775,64.944 cw(c56.82,63.899) P2.14@56.82,65.377 ; 56.183,65.352 ccw(c55.535,66) P2.14@56.451,66 ; 56.208,65.378 cw(c56.82,64.766) P2.14@56.82,65.631 ; P2.14@56.82,66.369 ccw(c56.82,67.285) 57.468,66.637 ; P2.14@56.82,66.623 ccw(c56.82,68.153) 57.902,67.071 ; P2.14@56.871,66.04 59.284,68.453 60.916,68.453 R18.2@62.841,70.378 ; P2.14@57.189,66 cw(c58.054,66) 57.442,66.612 ; P2.14@57.443,66 cw(c58.921,66) 57.876,67.045 ; 61.778,69.315 ccw(c60.714,70.378) R18.2@62.218,70.378 ; 61.899,69.435 cw(c62.791,68.543) R18.2@62.791,69.805 ; R18.2@62.211,69.748 ccw(c61.582,70.378) R18.2@62.472,70.378 ; R18.2@62.814,70.307 R18.2@62.878,70.371
LCD_DB6: P2.15 R25.2 U1.52 | length 44.1
  Top Layer w0.254: U1.52@46.023,49.929 47.851,49.929 50.905,52.982 50.905,62.874 51.794,63.763 55.299,63.763 55.909,64.373 57.946,64.373 59.36,65.786 59.36,65.964 61.824,68.428 63.707,68.428 65.635,70.356 R25.2@65.635,70.378 ; 58.145,64.571 ccw(c56.717,66) P2.15@58.737,66 ; 58.579,65.005 ccw(c57.584,66) P2.15@58.991,66 ; 58.661,65.088 cw(c59.36,64.389) P2.15@59.36,65.377 ; P2.15@59.36,66.369 ccw(c59.36,67.347) 60.051,66.655 ; P2.15@59.36,66.623 ccw(c59.36,68.214) 60.485,67.089 ; P2.15@59.729,66 cw(c60.533,66) 59.964,66.568 ; P2.15@59.983,66 cw(c61.4,66) 60.398,67.002 ; 64.556,69.277 ccw(c63.455,70.378) R25.2@65.012,70.378 ; 64.73,69.451 cw(c65.585,68.596) R25.2@65.585,69.805 ; R25.2@64.99,69.711 ccw(c64.322,70.378) R25.2@65.266,70.378
LCD_DB7: P2.16 R26.2 U1.51 | length 48.4
  Top Layer w0.254: U1.51@46.023,49.429 48.057,49.429 51.404,52.775 51.404,62.656 52.012,63.264 55.506,63.264 56.116,63.874 58.317,63.874 59.179,64.736 60.672,64.736 61.9,65.964 61.9,65.989 63.729,67.818 67.183,67.818 68.402,69.037 ; 60.811,64.875 ccw(c59.686,66) P2.16@61.277,66 ; 60.898,64.962 cw(c61.9,63.96) P2.16@61.9,65.377 ; 61.245,65.309 ccw(c60.553,66) P2.16@61.531,66 ; 61.332,65.396 cw(c61.9,64.827) P2.16@61.9,65.631 ; P2.16@61.9,66.369 ccw(c61.9,67.285) 62.548,66.637 ; P2.16@61.9,66.623 ccw(c61.9,68.153) 62.982,67.071 ; P2.16@62.269,66 cw(c63.134,66) 62.522,66.612 ; P2.16@62.523,66 cw(c64.001,66) 62.956,67.045 ; R26.2@68.038,69.96 cw(c67.2,69.063) 68.428,69.063 ; R26.2@68.212,70.145 cw(c67.747,69.648) 68.428,69.648 ; 68.428,69.644 cw(c69.109,69.644) R26.2@68.646,70.144 ; R26.2@68.428,70.358 68.428,69.063 ; R26.2@68.453,70.358 R26.2@68.453,70.485 ; R26.2@68.819,69.958 ccw(c69.647,69.063) 68.428,69.063
LCD_DI: P2.8 R10.2 U1.48 | length 51.6
  Top Layer w0.254: P2.8@41.58,66.369 ccw(c41.58,67.347) 42.271,66.655 ; P2.8@41.58,66.623 ccw(c41.58,68.214) 42.705,67.089 ; P2.8@41.616,66 45.994,70.378 R10.2@46.077,70.378 ; P2.8@41.949,66 cw(c42.753,66) 42.184,66.568 ; P2.8@42.203,66 cw(c43.62,66) 42.618,67.002 ; 44.993,69.377 cw(c46.027,68.342) R10.2@46.027,69.805 ; 45.073,69.457 ccw(c44.151,70.378) R10.2@45.454,70.378 ; R10.2@45.426,69.81 cw(c46.027,69.209) R10.2@46.027,70.059 ; R10.2@45.491,69.825 46.05,70.383 R10.2@46.05,70.434 ; R10.2@45.506,69.89 ccw(c45.018,70.378) R10.2@45.708,70.378 ; U1.48@46.023,47.929 50.9,47.929 51.903,48.931 51.903,61.961 v1@52.362,62.42 ; v1@52.176,62.408 cw(c51.759,62.408) 52.054,62.112 cw(c52.349,61.817) v1@52.349,62.235
  Bottom Layer w0.254: P2.8@41.554,66.015 42.701,64.868 49.889,64.868 v1@52.337,62.42 ; P2.8@41.58,65.377 cw(c41.58,63.9) 42.625,64.944 ; P2.8@41.58,65.631 cw(c41.58,64.767) 42.191,65.378 ; P2.8@41.949,66 ccw(c42.866,66) 42.218,65.351 ; P2.8@42.203,66 ccw(c43.734,66) 42.651,64.918 ; v1@52.176,62.408 ccw(c51.759,62.408) 52.054,62.703 ccw(c52.349,62.998) v1@52.349,62.581
  other v1: 52.349,62.408
LCD_LED_SW: R14.1 U1.44 | length 49.6
  Top Layer w0.254: U1.44@46.023,45.929 48.342,45.929 48.346,45.933 51.727,45.933 53.899,48.104 53.899,56.972 54.698,57.771 54.698,61.734 56.312,63.348 58.674,63.348 59.512,64.186 61.341,64.186 61.874,64.719 68.097,64.719 68.783,65.405 68.783,67.615 69.926,68.758 69.926,71.069 71.222,72.365 R14.1@71.45,72.365 ; 70.133,71.276 cw(c71.4,70.009) R14.1@71.4,71.801 ; 70.542,71.685 ccw(c69.852,72.374) R14.1@70.827,72.374 ; 70.567,71.71 cw(c71.4,70.876) R14.1@71.4,72.055
LCD_RST: C22.1 P2.4 R5.2 | length 22.3
  Top Layer w0.254: P2.4@31.42,66.015 34.29,68.885 34.29,69.799 R5.2@34.874,70.383 ; P2.4@31.42,66.369 ccw(c31.42,67.224) 32.025,66.619 ; P2.4@31.42,66.623 ccw(c31.42,68.091) 32.458,67.053 ; P2.4@31.789,66 cw(c32.716,66) 32.06,66.655 ; P2.4@32.043,66 cw(c33.583,66) 32.494,67.089 ; C22.1@32.156,72.339 32.791,71.704 33.35,71.704 34.468,70.587 R5.2@34.468,69.825 ; 33.574,71.48 ccw(c34.851,72.758) R5.2@34.851,70.951 ; 33.997,71.057 cw(c33.318,70.378) R5.2@34.278,70.378 ; 34.008,71.047 ccw(c34.851,71.89) R5.2@34.851,70.697 ; 34.29,68.783 cw(c35.406,68.783) R5.2@35.04,69.837 ; 34.29,69.14 cw(c35.282,69.14) R5.2@34.956,70.077 ; 34.29,69.497 cw(c35.158,69.497) R5.2@34.873,70.317 ; R5.2@34.29,69.854 cw(c35.033,69.854) R5.2@34.789,70.557 ; R5.2@34.442,70.002 R5.2@34.671,70.231 ; R5.2@34.48,70.091 R5.2@35.344,70.091
LCD_RW: P2.7 R9.2 U1.47 | length 56.1
  Top Layer w0.254: P2.7@39.04,66.369 ccw(c39.04,67.285) 39.688,66.637 ; P2.7@39.04,66.623 ccw(c39.04,68.153) 40.122,67.071 ; P2.7@39.065,66.015 42.672,69.621 ; P2.7@39.409,66 cw(c40.274,66) 39.662,66.612 ; P2.7@39.663,66 cw(c41.141,66) 40.096,67.045 ; 42.117,69.066 ccw(c40.805,70.378) R9.2@42.66,70.378 ; 42.551,69.5 ccw(c41.673,70.378) R9.2@42.914,70.378 ; 42.589,69.538 cw(c43.233,68.894) R9.2@43.233,69.805 ; R9.2@42.736,70.094 cw(c42.394,69.9) 42.672,69.621 ; R9.2@43.183,69.807 ccw(c43.127,69.166) 42.672,69.621 ; R9.2@43.282,70.282 R9.2@43.282,70.434 ; R9.2@43.332,70.764 43.332,70.51 42.672,69.85 42.672,69.621 ; U1.47@46.023,47.429 47.725,47.429 47.726,47.43 51.107,47.43 52.402,48.724 52.402,60.885 ; 52.402,60.085 cw(c53.681,60.085) v1@52.777,60.99 ; 52.402,60.699 cw(c53.068,60.699) v1@52.597,61.17 ; v1@52.482,61.1 cw(c52.207,61.08) 52.402,60.885 ; v1@52.613,60.944 ccw(c52.56,60.727) 52.402,60.885 ; v1@52.68,61.112 52.629,61.112 52.402,60.885
  Bottom Layer w0.254: P2.7@39.04,65.377 cw(c39.04,63.961) 40.041,64.962 ; P2.7@39.04,65.631 cw(c39.04,64.828) 39.608,65.396 ; P2.7@39.065,65.938 40.634,64.369 48.305,64.369 51.105,61.57 52.197,61.57 v1@52.642,61.125 ; P2.7@39.409,66 ccw(c40.388,66) 39.696,65.308 ; P2.7@39.663,66 ccw(c41.255,66) 40.129,64.874 ; v1@52.481,61.112 ccw(c52.064,61.112) 52.359,61.408 ccw(c52.654,61.703) v1@52.654,61.285
  other v1: 52.654,61.112
LED-: P2.18 Q1.3 | length 13.1
  Top Layer w0.254: P2.18@66.929,66.015 67.081,66.015 67.056,65.989 67.081,65.989 67.031,66.04 P2.18@67.031,66.015 ; Q1.3@71.328,68.07 ccw(c71.033,68.366) 71.45,68.366 ccw(c71.868,68.366) Q1.3@71.573,68.07 ; v1@71.328,68.483 cw(c71.033,68.188) 71.45,68.188 cw(c71.868,68.188) v1@71.573,68.483 ; v1@71.349,68.465 cw(c71.238,68.31) 71.422,68.261 ; Q1.3@71.45,67.673 v1(71.45,68.605) ; 71.478,68.261 cw(c71.663,68.31) v1@71.551,68.465
  Bottom Layer w0.254: P2.18@66.929,66.015 69.52,68.605 v1@71.476,68.605 ; P2.18@66.98,66.369 ccw(c66.98,67.101) 67.498,66.584 ; P2.18@66.98,66.623 ccw(c66.98,67.969) 67.932,67.017 ; P2.18@67.349,66 cw(c68.398,66) 67.656,66.742 ; P2.18@67.603,66 cw(c69.265,66) 68.09,67.176 ; v1@71.328,68.483 ccw(c71.033,68.188) 71.033,68.605 ccw(c71.033,69.023) v1@71.328,68.728
LEVEL_HIGH1: R79.2 U1.28 | length 42.9
  Top Layer w0.254: U1.28@38.173,42.579 38.173,34.62 40.118,32.675 47.004,32.675 47.146,32.817 v1(49.936,32.817) ; v1@49.814,32.694 ccw(c49.519,32.399) 49.519,32.817 ccw(c49.519,33.234) v1@49.814,32.939 ; v1@50.597,40.437 55.55,40.437 55.905,40.792 55.905,44.325 57.355,45.775 R79.2@58.092,45.775 ; v1@50.745,40.314 cw(c51.04,40.019) 51.04,40.437 cw(c51.04,40.854) v1@50.745,40.559
  Bottom Layer w0.254: v1@49.814,32.939 ccw(c49.457,33.296) 49.962,33.296 ; v1(49.936,32.817) 49.962,32.817 49.962,33.884 50.307,34.229 50.307,40.121 v1@50.635,40.45 ; 49.962,33.173 ccw(c50.293,33.173) v1@50.059,32.939 ; v1@50.449,40.437 cw(c50.032,40.437) 50.327,40.141 cw(c50.622,39.846) v1@50.622,40.264
  other v1: 50.622,40.437
LEVEL_HIGH2: R101.2 U1.30 | length 31
  Top Layer w0.254: U1.30@39.173,42.579 39.173,35.032 40.531,33.673 46.591,33.673 46.894,33.976 49.338,33.976 49.627,34.265 51.892,34.265 52.045,34.112 55.931,34.112 57.533,35.714 R101.2@57.533,35.234 ; 56.212,34.394 cw(c57.432,33.174) R101.2@57.432,34.899 ; 56.554,34.735 ccw(c55.817,35.472) R101.2@56.859,35.472 ; 56.646,34.827 cw(c57.432,34.042) R101.2@57.432,35.153
LEVEL_HIGHT1_PORT: P3.14 R59.1 R61.2 | length 60.5
  Top Layer w0.254: R61.2@132.563,60.731 136.142,60.731 R59.1@136.705,61.294 ; R61.2@132.823,61.059 ccw(c133.615,61.851) 133.615,60.731 ; R61.2@133.003,60.429 cw(c133.734,59.698) 133.734,60.731 ; R61.2@133.003,61.239 ccw(c134.228,62.464) 134.228,60.731 ; 134.099,60.731 ccw(c134.099,63.866) R59.1@136.315,61.65 ; 134.712,60.731 ccw(c134.712,63.253) R59.1@136.495,61.47 ; 134.901,60.87 cw(c134.984,60.543) v1@135.297,60.668 ; 135.068,60.786 cw(c135.101,60.569) v1@135.301,60.66 ; 135.182,60.941 cw(c135.255,60.651) v1@135.533,60.761 ; v1@135.325,60.731 ccw(c135.325,62.64) R59.1@136.675,61.29 ; v1@135.336,60.609 ccw(c135.041,60.314) 135.041,60.731 ccw(c135.041,61.149) v1@135.336,60.854 ; v1@135.379,60.748 cw(c136.087,60.599) 135.715,61.219 ; v1@135.545,60.881 ccw(c135.695,61.141) 135.772,60.851 ; v1@135.581,60.609 cw(c135.876,60.314) 135.876,60.731 cw(c135.876,61.149) v1@135.581,60.854 ; v1@135.608,60.645 cw(c136.072,60.377) 135.933,60.894 ; v1@135.625,60.686 cw(c136.347,60.488) 135.976,61.138 ; 135.938,60.731 ccw(c135.938,62.027) R59.1@136.854,61.111
  Bottom Layer w0.254: v1(135.458,60.731) 138.201,60.731 139.17,59.763 139.17,56.088 140.219,55.039 140.219,52.305 140.981,51.543 140.981,47.067 142.147,45.9 142.147,30.446 143.027,29.566 143.027,28.981 ; v1@135.581,60.609 cw(c135.876,60.314) 135.876,60.731 cw(c135.876,61.149) v1@135.581,60.854 ; P3.14@143.378,28.043 ccw(c142.173,28.127) 143.027,28.981 ; 143.422,28.587 cw(c142.91,28.076) P3.14@143.632,28.026 ; 143.43,28.579 ccw(c143.941,29.09) P3.14@143.98,28.368 ; P3.14@143.966,28.622 cw(c143.899,29.853) 143.027,28.981 ; P3.14@143.98,28.029 143.027,28.981
LEVEL_HIGHT2_PORT: P3.16 R81.1 R83.2 | length 59
  Top Layer w0.254: R83.2@133.605,51.357 ccw(c133.362,51.6) R83.2@133.706,51.6 ; R83.2@133.706,50.978 133.706,54.28 134.899,55.474 R81.1@136.042,55.474 ; 133.706,51.844 ccw(c134.902,51.844) R83.2@134.056,50.998 ; 133.706,52.457 ccw(c135.516,52.457) R83.2@134.236,51.177 ; 133.706,53.07 ccw(c136.129,53.07) R83.2@134.415,51.357 ; v1@135.209,55.351 ccw(c134.914,55.056) 134.914,55.474 ccw(c134.914,55.891) v1@135.209,55.596 ; v1@135.286,55.474 cw(c135.286,54.018) R81.1@136.315,55.047 ; v1@135.388,55.474 ccw(c135.388,56.785) R81.1@136.315,55.858 ; v1@135.418,55.324 cw(c135.607,54.997) 135.704,55.362 ; v1@135.418,55.623 ccw(c135.652,56.029) 135.773,55.577 ; v1@135.454,55.351 cw(c135.749,55.056) 135.749,55.474 cw(c135.749,55.891) v1@135.454,55.596 ; v1@135.481,55.387 cw(c135.799,55.204) 135.704,55.558 ; v1@135.481,55.56 ccw(c135.877,55.789) 135.759,55.347 ; 135.899,55.474 cw(c135.899,54.631) R81.1@136.495,55.227 ; 136.002,55.474 ccw(c136.002,56.171) R81.1@136.495,55.678 ; R81.1@136.682,55.452 R81.1@136.721,55.452
  Bottom Layer w0.254: v1@135.306,55.474 138.372,55.474 139.221,54.625 139.221,51.891 139.983,51.129 139.983,46.653 141.149,45.486 141.149,30.032 141.97,29.212 141.97,25.01 P3.16@143.98,23 ; v1@135.454,55.351 cw(c135.749,55.056) 135.749,55.474 cw(c135.749,55.891) v1@135.454,55.596 ; 142.902,24.078 ccw(c144,25.176) P3.16@144,23.623 ; 142.951,24.029 cw(c141.922,23) P3.16@143.377,23 ; 143.335,23.644 ccw(c144,24.309) P3.16@144,23.369 ; 143.385,23.595 cw(c142.789,23) P3.16@143.631,23
  other v1: 135.331,55.474